# EAGLE board ESP-01_Slim (EAGLE 9.6.2)
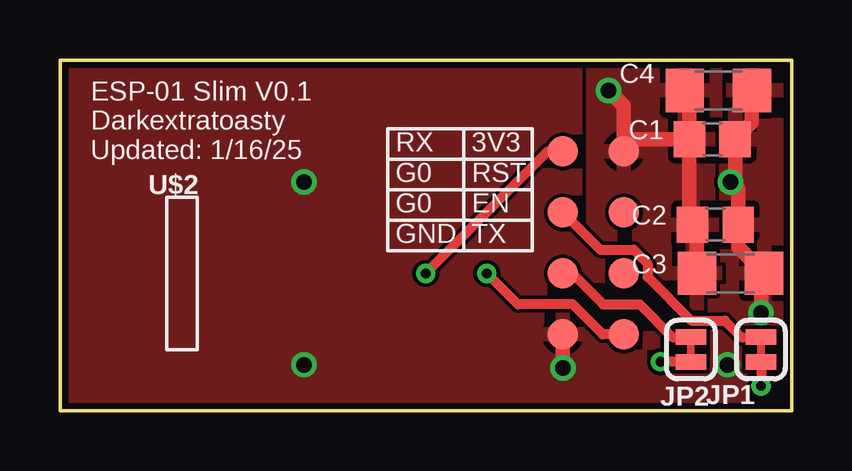
[diagram p0: board, top side]
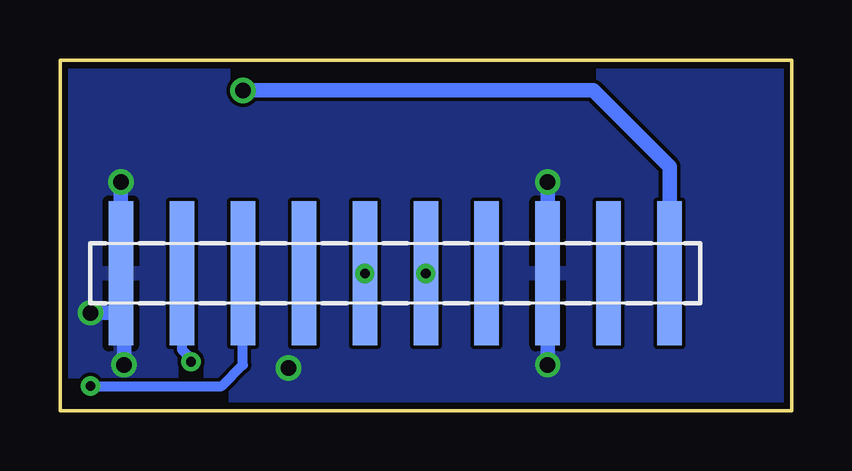
[diagram p1: board, bottom side, seen from below]

Size 30.48 x 14.61 mm. Coordinates in mm from the lower left corner, seen from the top.
Outline: 30.48,0 30.48,14.61 0,14.61 0,0 30.48,0
Copper layers (1*16): Top 0.035mm / dielectric 1.5mm / Bottom 0.035mm
Design rules "default *": minimum track width 6mil, minimum drill 0.35mm, track to track 6mil, track to pad 6mil, pad to pad 6mil, via to via 6mil, smd to smd 6mil, copper to edge 10mil, drill to drill 6mil, minimum pad ring 10mil, minimum via ring 8mil, stop-mask expansion 4mil, vias tented up to drill 0mil, thermal gap 10mil

## Footprints (pad centres in the part's own frame; a part is rotated, then mirrored left to right if it is on the bottom)
C0805 = smd 1.3 x 1.5: 1 -0.95,0; 2 0.95,0
C3216 = smd 1.6 x 1.8: 1 -1.4,0; 2 1.4,0
SMT-JUMPER_2_NC_TRACE_SILK = smd 0.66 x 1.27: 1 -0.521,0; 2 0.521,0
B1,27 = smd 1.27 x 1.27: TP 0,0
RIGHT-H2-SMD = smd 1.02 x 6 bottom: 1 0,0; 2 2.54,0; 3 5.08,0; 4 7.62,0; 5 10.16,0; 6 12.7,0; 7 15.24,0; 8 17.78,0; 9 20.32,0; 10 22.86,0

## Placement (x,y rotation side)
C1  100nf  [C0805]  27.18,11.3 0 top
C2  1uf  [C0805]  27.3,7.75 0 top
C3  22uf  [C3216]  27.94,5.71 0 top
C4  22uf  [C3216]  27.43,13.34 0 top
JP1  JUMPER-SMT_2_NC_TRACE_SILK  [SMT-JUMPER_2_NC_TRACE_SILK]  29.21,2.54 90 top
JP2  JUMPER-SMT_2_NC_TRACE_SILK  [SMT-JUMPER_2_NC_TRACE_SILK]  26.29,2.54 90 top
TP1  PTR1B1,27  [B1,27]  23.5,3.17 0 top
TP2  PTR1B1,27  [B1,27]  23.5,5.71 0 top
TP3  PTR1B1,27  [B1,27]  23.5,8.26 0 top
TP4  PTR1B1,27  [B1,27]  23.5,10.79 0 top
TP5  PTR1B1,27  [B1,27]  20.95,3.17 0 top
TP6  PTR1B1,27  [B1,27]  20.95,5.71 0 top
TP7  PTR1B1,27  [B1,27]  20.95,8.26 0 top
TP8  PTR1B1,27  [B1,27]  20.95,10.79 0 top
U$2  RIGHT-H2-SMD  [RIGHT-H2-SMD]  5.08,5.71 0 top

## Library data of the parts
C1-C4 = rcl; SPICEPREFIX: C
JP1 JP2 = SparkFun-Jumpers
TP1-TP8 = testpad
U$2 = Flipper-Zero-GPIO-Headers

## Nets
+3V3: C1.1 C2.1 C3.1 C4.1 TP4.TP U$2.1
CHA: JP1.2 TP7.TP
CHB: JP2.2 TP6.TP
FRX: TP1.TP U$2.6
FTX: TP8.TP U$2.5
GND: C1.2 C2.2 C3.2 C4.2 TP5.TP U$2.3 U$2.10
N$1: JP1.1 U$2.8
N$4: JP2.1 U$2.9

## Tracks (layer width: path | path; a pad name or v marks a point on that pad's centre or on a via)
+3V3  (via drill 0.65)
  Top 0.61: C3.1 26.54,7.56 C2.1 26.23,7.87 C1.1 | C4.1 26.23,13.14 C1.1 | v22.86,13.34 23.5,12.7 TP4.TP 24,11.3 C1.1
  Bottom 0.61: U$2.1 5.08,10.16 8.26,13.34 v22.86,13.34
  pour Top: 27.3,14.61 27.3,4.45 22.23,4.45 22.23,14.61
CHA
  Top 0.406: TP7.TP 22.5,6.71 23.91,6.71 24.49,6.12 24.49,5.57 26.31,3.75 27.71,3.75 28.39,3.06 JP1.2
CHB
  Top 0.406: TP6.TP 21.34,5.71 22.63,4.42 24.16,4.42 25.52,3.06 JP2.2
FRX  (via drill 0.4)
  Top 0.406: TP1.TP 22.61,3.17 21.36,4.42 19.07,4.42 U$2.6
  other vias: 17.78,5.71
FTX  (via drill 0.4)
  Top 0.406: TP8.TP 20.32,10.79 U$2.5
  other vias: 15.24,5.71
GND  (via drill 0.65)
  Top 0.61: C4.2 28.83,12.01 C1.2 28.13,9.71 v27.94,9.53 28.25,9.21 C2.2 28.25,6.8 C3.2 29.21,5.58 v29.21,4.07 | TP5.TP v20.95,1.78
  Bottom 0.61: v10.16,9.53 U$2.3 v10.16,1.91 | v27.94,9.53 U$2.10 27.94,4.45 | v27.81,1.91 27.81,4.57 27.94,4.45 | v29.21,4.07 28.31,4.07 27.94,4.45
  pour Top (rank 2): 0,0 0,14.61 30.48,14.61 30.48,0
  pour Bottom (rank 2): 0,14.61 30.48,14.61 30.48,0 0,0
N$1  (via drill 0.4)
  Top 0.406: JP1.1 v29.21,1.02
  Bottom 0.406: U$2.8 22.86,1.91 23.75,1.02 v29.21,1.02
N$4  (via drill 0.4)
  Top 0.406: JP2.1 26.28,2.03 v25.02,2.03
  Bottom 0.406: U$2.9 25.4,2.54 25.02,2.16 v25.02,2.03

## Text on the board
tPlace: RX | 3V3 | ESP-01 Slim V0.1 / Darkextratoasty / Updated: 1/16/25 | G0 | RST | G0 | EN | GND | TX